# EAGLE board AquaLEd-drivers (EAGLE 8.4.1)
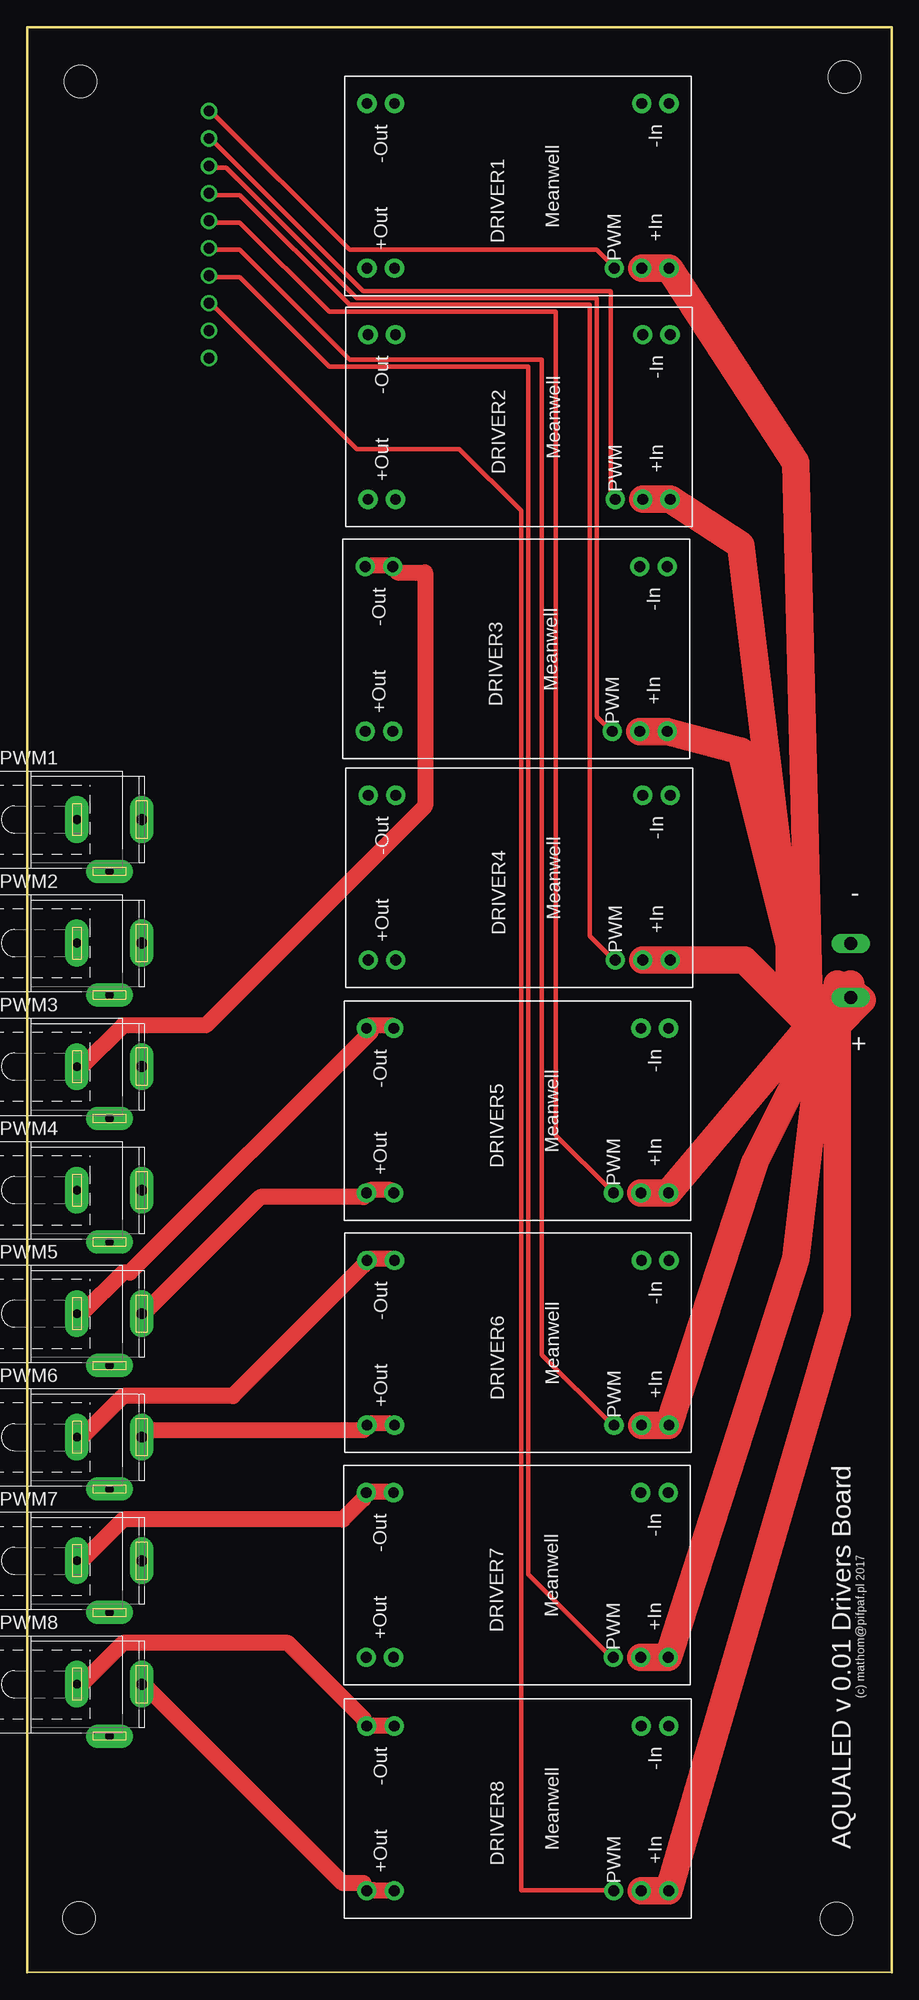
[diagram p0: board, top side]
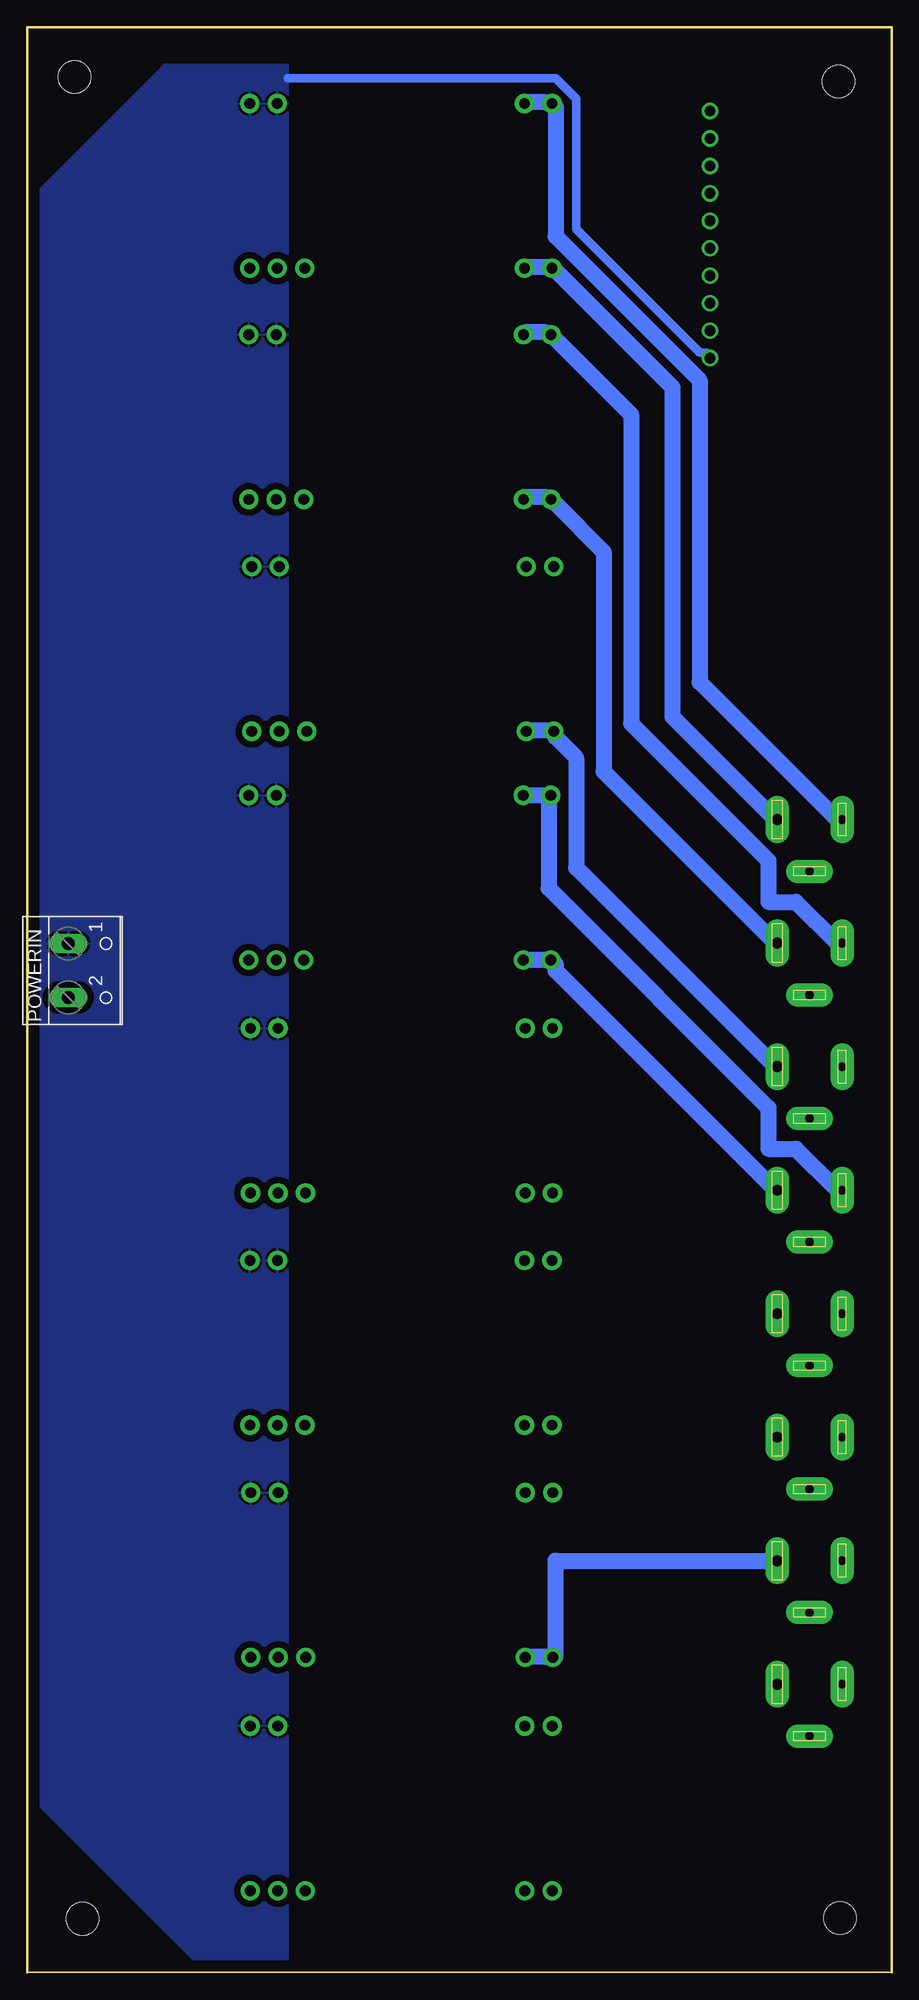
[diagram p1: board, bottom side, seen from below]

Size 80.01 x 180.01 mm. Coordinates in mm from the lower left corner, seen from the top.
Outline: 79.99,0 79.99,180.01 0,180.01 0,0 80.01,0
Copper layers (1*16): Top 0.035mm / dielectric 1.5mm / Bottom 0.035mm
Design rules "default": minimum track width 6mil, minimum drill 0.35mm, track to track 6mil, track to pad 6mil, pad to pad 6mil, via to via 6mil, smd to smd 6mil, copper to edge 40mil, drill to drill 6mil, minimum pad ring 10mil, minimum via ring 8mil, stop-mask expansion 4mil, vias tented up to drill 0mil, thermal gap 10mil
Net classes: 0 default: width 0.406 mm; 1 powerin: width 2 mm; 2 powerpwm: width 1.5 mm, clearance 0.6 mm; 3 power: width 0.8 mm, clearance 0.6 mm

## Footprints (pad centres in the part's own frame; a part is rotated, then mirrored left to right if it is on the bottom)
LDD-H = drill 1 pad 1.778: 1 -7.62,13.97; 2 -7.62,11.43; 11 -7.62,-11.43; 12 -7.62,-13.97; 13 7.62,-13.97; 14 7.62,-11.43; 22 7.62,8.89; 23 7.62,11.43; 24 7.62,13.97
W237-102 = drill 1.194 long: 1 -2.5,-1.27; 2 2.5,-1.27
SPC4078 = drill 0.8 pad 2.184 long: 1 -3,0; 2 0,-4.8 | drill 1 pad 2.184 long: 3 3,0
PCB = drill 1: P$1 16.83,172.24; P$2 16.83,169.7; P$3 16.83,167.16; P$4 16.83,164.62; P$5 16.83,162.08; P$6 16.83,159.54; P$7 16.83,157; P$8 16.83,154.46; P$9 16.83,151.92; P$10 16.83,149.38 | hole 3: 4.94,174.96; 75.64,175.39; 74.86,4.97; 4.79,5.02

## Placement (x,y rotation side)
DRIVER1  [LDD-H]  45.42,165.31 270 top
DRIVER2  [LDD-H]  45.52,143.93 270 top
DRIVER3  [LDD-H]  45.25,122.45 270 top
DRIVER4  [LDD-H]  45.53,101.3 270 top
DRIVER5  [LDD-H]  45.36,79.74 270 top
DRIVER6  [LDD-H]  45.42,58.26 270 top
DRIVER7  [LDD-H]  45.34,36.78 270 top
DRIVER8  [LDD-H]  45.39,15.19 270 top
POWERIN  [W237-102]  74.93,92.71 270 bottom
PWM1  [SPC4078]  7.62,106.68 0 top
PWM2  [SPC4078]  7.62,95.25 0 top
PWM3  [SPC4078]  7.62,83.82 0 top
PWM4  [SPC4078]  7.62,72.39 0 top
PWM5  [SPC4078]  7.62,60.96 0 top
PWM6  [SPC4078]  7.62,49.53 0 top
PWM7  [SPC4078]  7.62,38.1 0 top
PWM8  [SPC4078]  7.62,26.67 0 top
U$29  PCB  [PCB]  0,0 0 top

## Library data of the parts
DRIVER1-DRIVER8 = meanwell_dcdc_v8
POWERIN = con-wago-500; MPN: 237-102; OC_FARNELL: unknown; OC_NEWARK: 70K9898
PWM1-PWM8 = con-jack
U$29 = aqualed

## Nets
+5V: U$29.P$9
GND [power]: DRIVER1.1 DRIVER1.2 DRIVER2.1 DRIVER2.2 DRIVER3.1 DRIVER3.2 DRIVER4.1 DRIVER4.2 DRIVER5.1 DRIVER5.2 DRIVER6.1 DRIVER6.2 DRIVER7.1 DRIVER7.2 DRIVER8.1 DRIVER8.2 POWERIN.1 U$29.P$10
N$1: DRIVER1.22 U$29.P$1
N$2 [powerpwm]: DRIVER8.11 DRIVER8.12 PWM8.1
N$3 [powerpwm]: DRIVER8.13 DRIVER8.14 PWM8.3
N$4 [powerpwm]: DRIVER7.11 DRIVER7.12 PWM7.1
N$5 [powerpwm]: DRIVER7.13 DRIVER7.14 PWM7.3
N$6 [powerpwm]: DRIVER6.11 DRIVER6.12 PWM6.1
N$7 [powerpwm]: DRIVER6.13 DRIVER6.14 PWM6.3
N$8 [powerpwm]: DRIVER5.11 DRIVER5.12 PWM5.1
N$9 [powerpwm]: DRIVER5.13 DRIVER5.14 PWM5.3
N$10 [powerpwm]: DRIVER4.11 DRIVER4.12 PWM4.1
N$11 [powerpwm]: DRIVER4.13 DRIVER4.14 PWM4.3
N$12 [powerpwm]: DRIVER3.11 DRIVER3.12 PWM3.1
N$13 [powerpwm]: DRIVER3.13 DRIVER3.14 PWM3.3
N$14 [powerpwm]: DRIVER2.11 DRIVER2.12 PWM2.1
N$15 [powerpwm]: DRIVER2.13 DRIVER2.14 PWM2.3
N$16 [powerpwm]: DRIVER1.11 DRIVER1.12 PWM1.1
N$17 [powerpwm]: DRIVER1.13 DRIVER1.14 PWM1.3
N$18: DRIVER2.22 U$29.P$2
N$19: DRIVER3.22 U$29.P$3
N$20: DRIVER4.22 U$29.P$4
N$21: DRIVER5.22 U$29.P$5
N$22: DRIVER6.22 U$29.P$6
N$23: DRIVER7.22 U$29.P$7
N$24: DRIVER8.22 U$29.P$8
VIN [powerin]: DRIVER1.23 DRIVER1.24 DRIVER2.23 DRIVER2.24 DRIVER3.23 DRIVER3.24 DRIVER4.23 DRIVER4.24 DRIVER5.23 DRIVER5.24 DRIVER6.23 DRIVER6.24 DRIVER7.23 DRIVER7.24 DRIVER8.23 DRIVER8.24 POWERIN.2

## Tracks (layer width: path | path; a pad name or v marks a point on that pad's centre or on a via)
GND
  Bottom 0.8: 55.88,175.26 31.11,175.26 29.21,173.35 29.21,161.29 17.78,149.86 17.14,149.86 U$29.P$10
  pour Bottom: 55.88,176.53 67.31,176.53 80.01,163.83 80.01,16.51 63.5,0 59.69,0 57.15,0 55.88,1.27
N$1
  Top 0.406: U$29.P$1 17.14,172.09 29.84,159.38 52.7,159.38 53.98,158.12 DRIVER1.22
N$2
  Top 1.5: PWM8.1 5.08,26.67 8.89,30.48 24.13,30.48 31.11,23.5 DRIVER8.12 32.07,22.86 33.66,22.86 DRIVER8.11
N$3
  Top 1.5: PWM8.3 10.79,26.67 29.21,8.26 31.11,8.26 DRIVER8.13 32.07,7.62 33.66,7.62 DRIVER8.14
N$4
  Top 1.5: DRIVER7.11 33.66,44.45 31.75,44.45 DRIVER7.12 31.11,43.81 29.21,41.91 8.89,41.91 5.08,38.1 PWM7.1
N$5
  Bottom 1.5: PWM7.3 31.11,38.1 31.11,29.21 DRIVER7.13 32.07,29.21 33.66,29.21 DRIVER7.14
N$6
  Top 1.5: DRIVER6.11 33.66,66.04 31.75,66.04 DRIVER6.12 31.11,65.41 19.05,53.34 8.89,53.34 5.08,49.53 PWM6.1
N$7
  Top 1.5: DRIVER6.14 33.66,50.8 31.75,50.8 DRIVER6.13 31.11,50.16 11.43,50.16 10.79,49.53 PWM6.3
N$8
  Top 1.5: DRIVER5.11 33.66,87.63 31.75,87.63 DRIVER5.12 31.75,87 9.53,64.77 8.89,64.77 5.08,60.96 PWM5.1
N$9
  Top 1.5: DRIVER5.14 33.66,72.39 31.75,72.39 DRIVER5.13 31.11,71.75 21.59,71.75 10.79,60.96 PWM5.3
N$10
  Bottom 1.5: PWM4.1 5.08,72.39 8.89,76.2 11.43,76.2 11.43,80.01 31.75,100.33 31.75,108.58 DRIVER4.12 32.38,108.9 33.97,108.9 DRIVER4.11
N$11
  Bottom 1.5: PWM4.3 10.79,72.39 31.11,92.71 31.11,93.34 DRIVER4.13 32.07,93.66 33.97,93.66 DRIVER4.14
N$12
  Top 1.5: DRIVER3.12 31.75,130.18 33.66,130.18 DRIVER3.11 34.29,129.54 36.83,129.54 36.83,107.95 16.51,87.63 8.89,87.63 5.08,83.82 PWM3.1
N$13
  Bottom 1.5: PWM3.3 10.79,83.82 29.21,102.23 29.21,112.39 31.11,114.3 DRIVER3.13 31.75,114.94 33.66,114.94 DRIVER3.14
N$14
  Bottom 1.5: PWM2.1 5.08,95.25 8.89,99.06 11.43,99.06 11.43,102.87 24.13,115.57 24.13,144.15 31.11,151.13 DRIVER2.12 32.07,151.76 33.97,151.76 DRIVER2.11
N$15
  Bottom 1.5: PWM2.3 10.79,95.25 26.67,111.12 26.67,131.44 31.11,135.89 DRIVER2.13 32.07,136.53 33.97,136.53 DRIVER2.14
N$16
  Bottom 1.5: PWM1.1 5.08,106.68 17.78,119.38 17.78,147.32 31.11,160.66 31.11,172.72 DRIVER1.12 32.07,173.04 33.97,173.04 DRIVER1.11
N$17
  Bottom 1.5: PWM1.3 10.79,106.68 20.32,116.2 20.32,146.69 31.11,157.48 DRIVER1.13 32.07,157.8 33.97,157.8 DRIVER1.14
N$18
  Top 0.406: U$29.P$2 17.14,169.54 31.11,155.57 53.98,155.57 53.98,136.53 DRIVER2.22
N$19
  Top 0.406: U$29.P$3 17.14,167 18.41,167 30.48,154.94 52.7,154.94 52.7,116.2 53.98,114.94 DRIVER3.22
N$20
  Top 0.406: U$29.P$4 17.14,164.47 19.68,164.47 29.84,154.31 52.07,154.31 52.07,95.89 53.98,93.98 DRIVER4.22
N$21
  Top 0.406: U$29.P$5 17.14,161.93 19.68,161.93 27.94,153.67 48.9,153.67 48.9,77.47 53.98,72.39 DRIVER5.22
N$22
  Top 0.406: U$29.P$6 17.14,159.38 19.68,159.38 29.84,149.22 47.62,149.22 47.62,57.15 53.98,50.8 DRIVER6.22
N$23
  Top 0.406: U$29.P$7 17.14,156.84 19.68,156.84 27.94,148.59 46.35,148.59 46.35,36.83 53.98,29.21 DRIVER7.22
N$24
  Top 0.406: U$29.P$8 17.14,154.31 30.48,140.97 40.01,140.97 45.72,135.25 45.72,7.62 53.98,7.62 DRIVER8.22
VIN
  Top 2.54: 72.39,87.63 66.34,93.68 DRIVER4.24 DRIVER4.23 | 73.66,87.63 74.93,87.63 | 73.66,87.63 72.39,87.63 | 77.28,89.98 74.93,87.63 | DRIVER5.23 DRIVER5.24 72.39,87.63 | DRIVER6.23 DRIVER6.24 67.31,74.93 73.66,87.63 | DRIVER7.23 DRIVER7.24 71.12,66.04 73.66,87.63 | DRIVER8.23 DRIVER8.24 74.93,60.96 74.93,87.63 | DRIVER3.23 DRIVER3.24 66.04,113.03 70.52,95.1 | 70.52,95.1 72.39,87.63 | 70.52,95.1 66.04,132.08 DRIVER2.24 DRIVER2.23 | DRIVER1.23 DRIVER1.24 71.12,139.7 72.39,87.63 | 77.28,89.98 75.23,89.98 arc-45 75.05,90.05 74.93,90.17 | 74.93,90.17 73.66,90.17 | 76.98,90.17 74.93,90.17 | 76.98,90.17 arc-45 77.16,90.1 77.28,89.98 | 76.2,91.44 76.2,90.95 | 76.2,90.95 76.98,90.17 | 76.2,90.95 POWERIN.2 76.16,90.21 74.93,91.44 | 70.52,95.1 70.52,90.77 73.66,87.63

## Text on the board
tPlace: - | + | (c) mathom@pifpaf.pl 2017 | AQUALED v 0.01 Drivers Board